# EAGLE board pen15 (EAGLE 5.07)
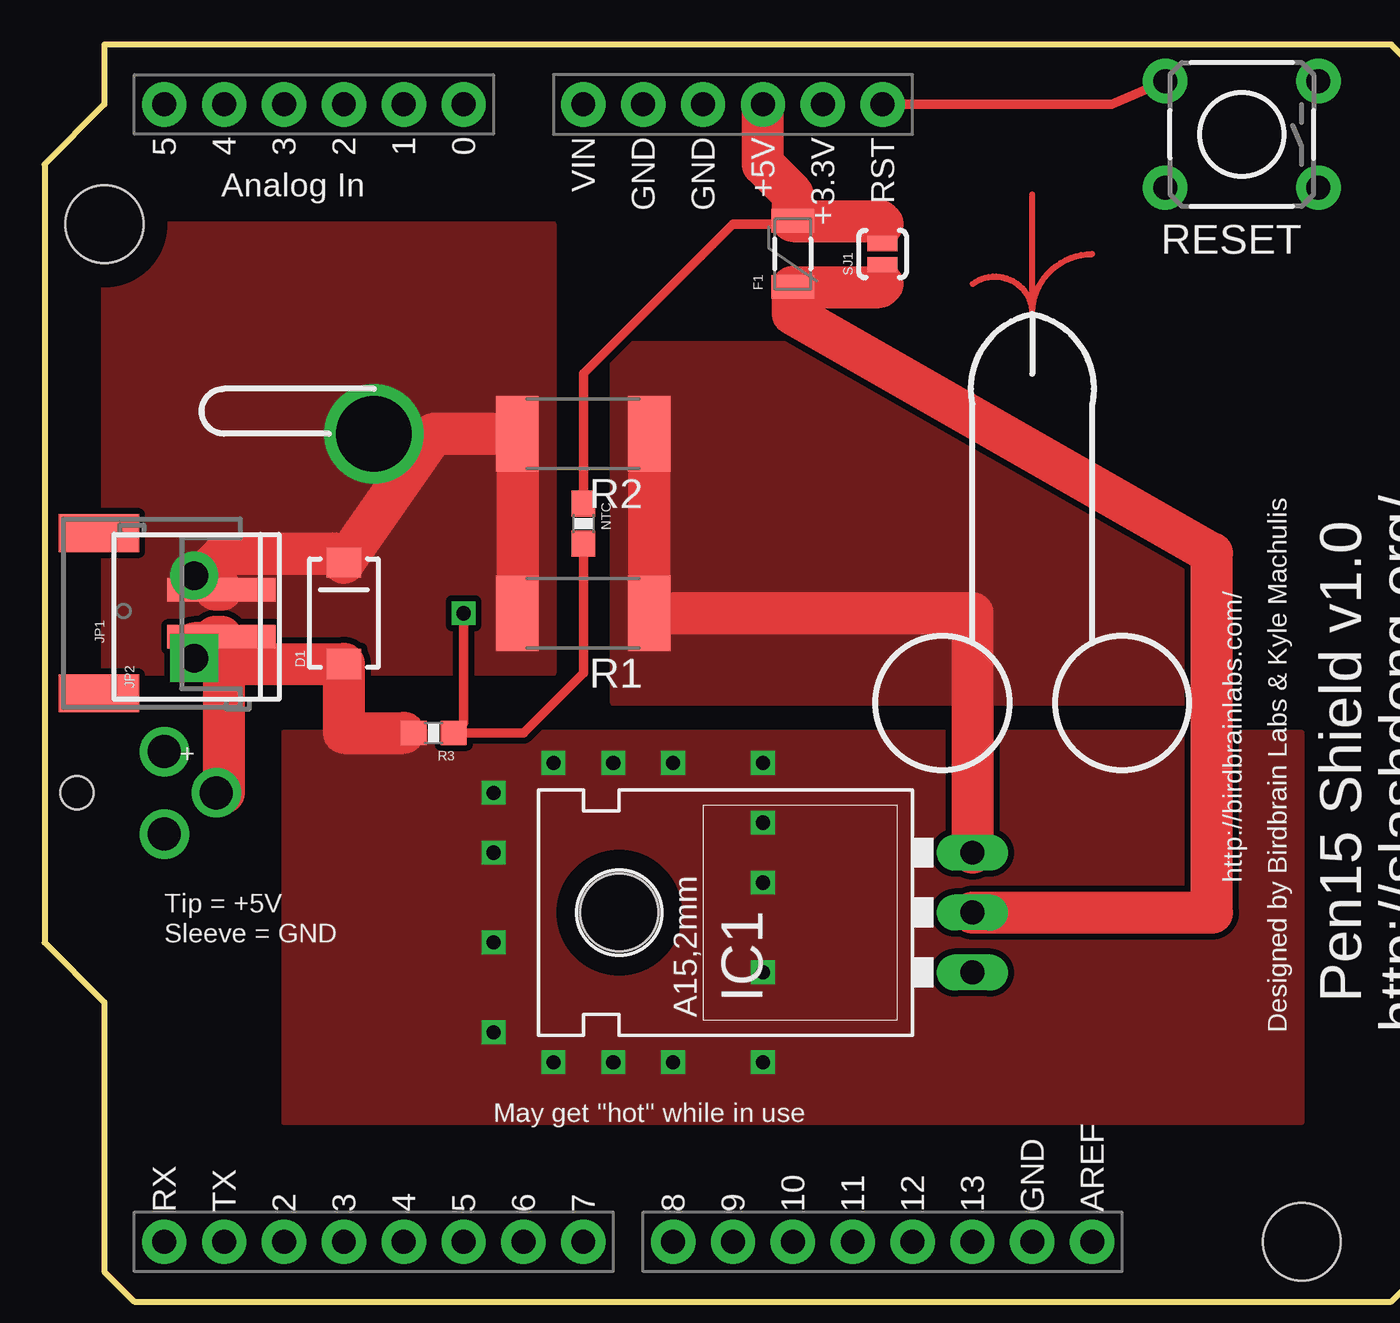
[diagram p0: board, top side]
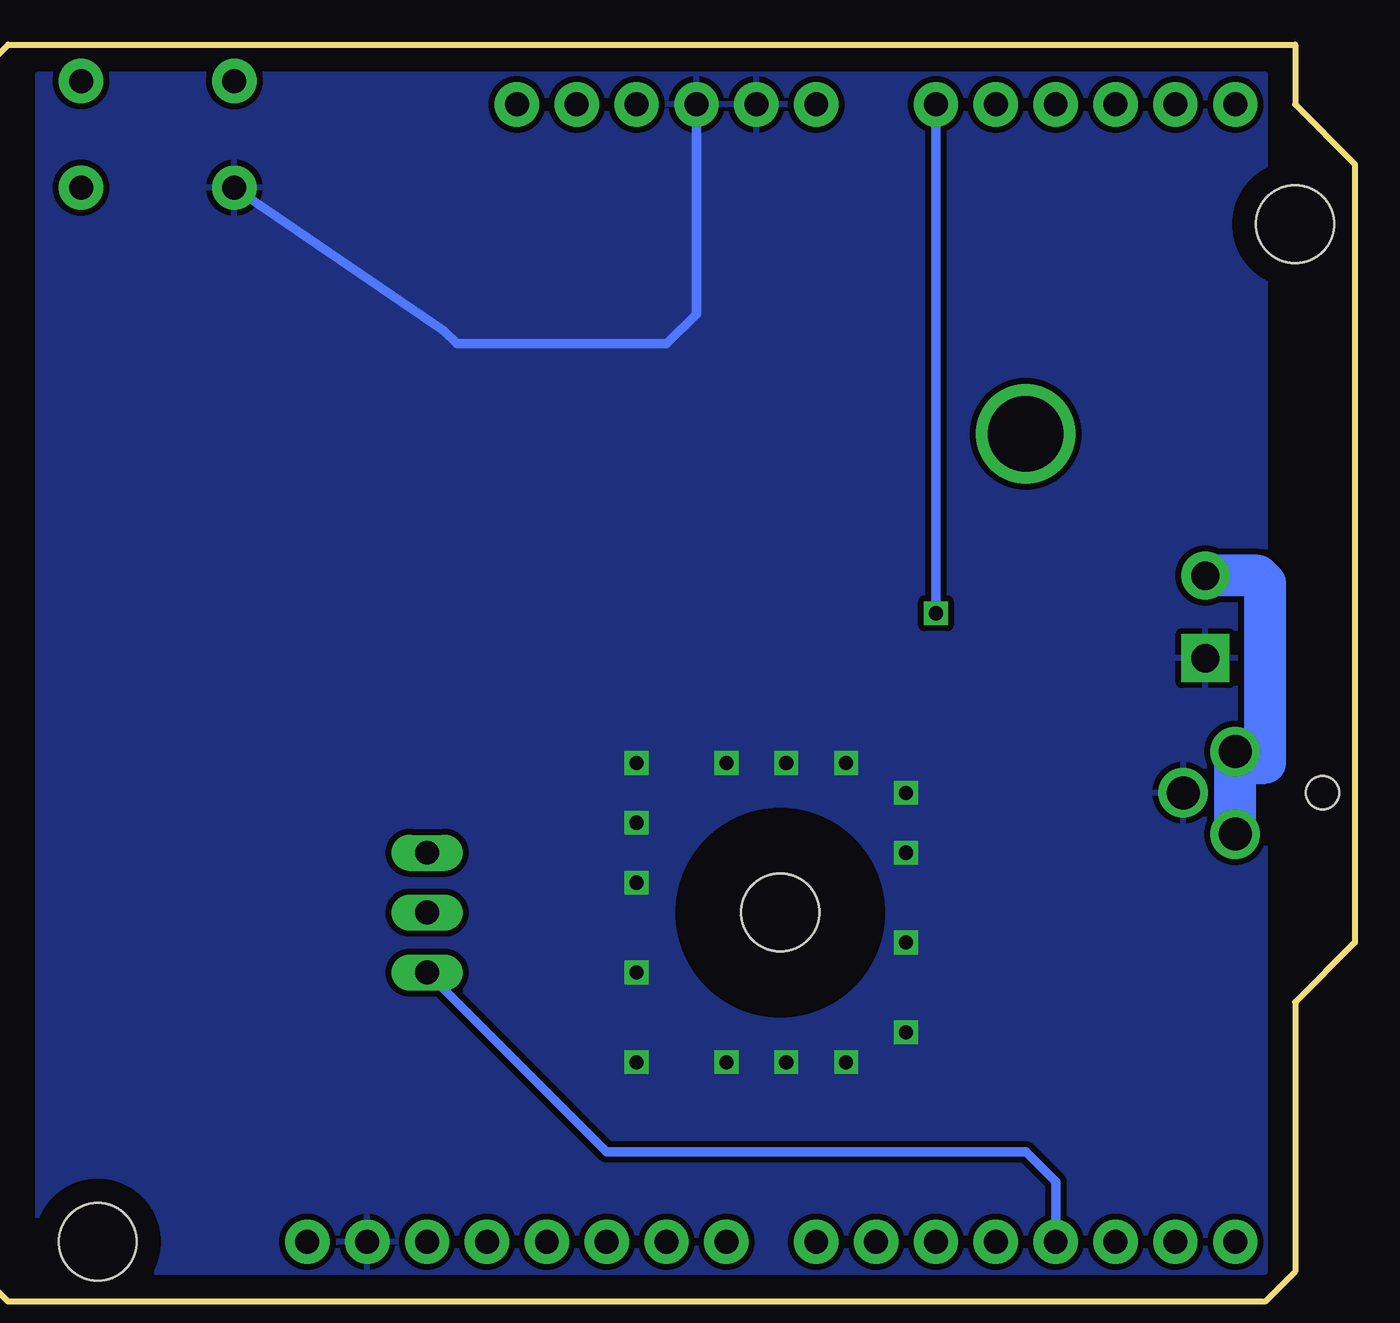
[diagram p1: board, bottom side, seen from below]

No outline drawn. Coordinates in mm, seen from the top.
Copper layers (1*16): Top 0.035mm / dielectric 1.5mm / Bottom 0.035mm
Design rules "default": minimum track width 10mil, minimum drill 24mil, track to track 8mil, track to pad 8mil, pad to pad 8mil, via to via 8mil, smd to smd 8mil, copper to edge 40mil, drill to drill 8mil, minimum pad ring 10mil, minimum via ring 8mil, stop-mask expansion 4mil, vias tented up to drill 0mil, thermal gap 10mil
Milling: 11 lines

## Footprints (pad centres in the part's own frame; a part is rotated, then mirrored left to right if it is on the bottom)
SMA-DIODE = smd 1.27 x 1.47: A -2.15,0; C 2.15,0
PTC-1206 = smd 1 x 1.8: 1 -1.4,0; 2 1.4,0
78XXL = drill 1.016 long: GND 0,-3.81; IN -2.54,-3.81; OUT 2.54,-3.81 | hole 3.302: 0,11.176
S2B-PH = smd 1 x 4.6: 1 -1,-3.7; 2 1,-3.7 | smd 1.6 x 3.4: NC1 -3.4,1.5; NC2 3.4,1.5
SCREWTERMINAL-3.5MM-2 = drill 1.2 pad 2.032 square: 1 0,0 | drill 1.2 pad 2.032 round: 2 3.5,0
0603-RES = smd 1.1 x 1: 1 -0.85,0; 2 0.85,0
R2512 = smd 1.8 x 3.2: 1 -2.8,0; 2 2.8,0
TACTILE-PTH = drill 1.016 pad 1.88 round: 1 -3.251,2.261; 2 3.251,2.261; 3 -3.251,-2.261; 4 3.251,-2.261
SJ_2S-NO = smd 0.635 x 1.27: 1 -0.45,0; 2 0.45,0
DUEMILANOVE_SHIELD = drill 1.016 pad 1.88 round: 3.3V 50.8,26.67; 5V 50.8,29.21; A0 50.8,41.91; A1 50.8,44.45; A2 50.8,46.99; A3 50.8,49.53; A4 50.8,52.07; A5 50.8,54.61; AREF 2.54,15.24; D2 2.54,49.53; D3 2.54,46.99; D4 2.54,44.45; D5 2.54,41.91; D6 2.54,39.37; D7 2.54,36.83; D8 2.54,33.02; D9 2.54,30.48; D10 2.54,27.94; D11 2.54,25.4; D12 2.54,22.86; D13 2.54,20.32; GND@0 50.8,31.75; GND@1 50.8,34.29; GND@2 2.54,17.78; RES 50.8,24.13; RX 2.54,54.61; TX 2.54,52.07; VIN 50.8,36.83 | hole 3.302: 45.72,57.15; 2.54,6.35
2.5MM-KOBIKON = drill 1.397 round: 1 2.21,0; 2 0,1.753; 3 0,-1.753 | hole 1.397: -3.708,0

## Placement (x,y rotation side)
D1  [SMA-DIODE]  12.7,29.21 90 top
F1  PTCSMD  [PTC-1206]  31.75,44.45 90 top
IC1  [78XXL]  35.56,16.51 90 top
JP1  [S2B-PH]  3.81,29.21 90 top
JP2  [SCREWTERMINAL-3.5MM-2]  6.35,27.3 90 top
NTC  [0603-RES]  22.86,33.02 270 top
R1  [R2512]  22.86,29.21 180 top
R2  [R2512]  22.86,36.83 180 top
R3  [0603-RES]  16.51,24.13 180 top
RESET  [TACTILE-PTH]  50.8,49.53 180 top
SJ1  SOLDERJUMPERNO  [SJ_2S-NO]  35.56,44.45 90 top
U1  ARDUINO_SHIELDLABEL  [DUEMILANOVE_SHIELD]  59.69,0 90 top
U$1  2.5MM-KOBIKON  [2.5MM-KOBIKON]  5.08,21.59 0 top

## Library data of the parts
D1 F1 IC1 JP1 JP2 NTC R1-R3 RESET SJ1 U1 = SparkFun
U$1 = BLP3

## Nets
GND: D1.A JP1.1 JP2.1 R3.2 RESET.2 U1.GND@0 U1.GND@1 U1.GND@2 U$1.1
N$1: IC1.IN U1.D3
N$2: D1.C JP1.2 JP2.2 R1.2 R2.2 U$1.2 U$1.3
N$3: F1.1 IC1.GND SJ1.1
N$5: RESET.4 U1.RES
N$7: IC1.OUT R1.1 R2.1
TEMP: NTC.2 R3.1 U1.A0
VCC: F1.2 NTC.1 SJ1.2 U1.5V

## Tracks (layer width: path | path; a pad name or v marks a point on that pad's centre or on a via)
GND  (via drill 0.6)
  Top 1.778: U$1.1 7.62,21.59 7.62,27.06 | 7.51,27.94 6.35,27.94 JP2.1 7.25,28.21 JP1.1 7.51,27.94 | 7.62,27.06 D1.A 12.7,24.13 15.24,24.13 | 7.62,27.06 7.62,27.94 7.51,27.94
  Bottom 0.406: RESET.2 38.66,41.2 38.1,40.64 29.21,40.64 27.94,41.91 U1.GND@0
  other vias: 21.59,22.86 24.13,22.86 26.67,22.86 30.48,22.86 30.48,20.32 30.48,17.78 30.48,13.97 30.48,10.16 26.67,10.16 24.13,10.16 21.59,10.16 19.05,11.43 19.05,15.24 19.05,19.05 19.05,21.59
  pour Top (isolate 0.254, no thermals): 10.16,24.13 10.16,7.62 53.34,7.62 53.34,24.13
  pour Bottom (isolate 0.254): 3.81,52.07 55.88,52.07 55.88,1.27 3.81,1.27
N$1
  Bottom 0.406: U1.D3 12.7,5.08 13.97,6.35 31.75,6.35 IC1.IN
N$2  (via drill 3.2)
  Top 1.778: R1.2 R2.2 16.51,36.83 D1.C 12.31,31.75 7.62,31.75 6.67,30.8 | JP2.2 6.67,30.8 | 6.67,30.8 7.27,30.21 JP1.2
  Bottom 1.778: JP2.2 4.13,30.8 3.81,30.48 3.81,22.86 5.08,22.86 | 5.08,22.86 U$1.2 | U$1.3 5.08,22.86
  other vias: 13.97,36.83
  pour Top (isolate 0.254, no thermals): 2.54,45.72 21.59,45.72 21.59,26.67 2.54,26.67
N$3
  Top 0.254: 35.56,43.18 SJ1.1
  Top 1.778: IC1.GND 49.53,16.51 49.53,31.75 31.75,41.91 F1.1 35.43,43.05 35.56,43.18
N$4
  Top 0.254: 41.91,41.91 41.91,46.99 | 41.91,41.91 arc-90 44.45,44.45 | 39.37,43.18 arc-127 41.91,41.91
N$5
  Top 0.406: U1.RES 45.29,50.8 RESET.4
N$7
  Top 1.778: IC1.OUT 39.37,29.21 R1.1 R2.1
  pour Top (isolate 0.254, no thermals): 24.13,40.64 50.8,40.64 50.8,25.4 24.13,25.4
TEMP  (via drill 0.6)
  Top 0.406: NTC.2 22.86,26.67 20.32,24.13 R3.1 17.78,24.55 v17.78,29.21
  Bottom 0.406: v17.78,29.21 U1.A0
VCC
  Top 0.254: 35.56,45.72 SJ1.2
  Top 0.406: NTC.1 22.86,39.37 29.21,45.72 31.62,45.72 F1.2
  Top 1.778: U1.5V 30.48,48.26 31.75,46.99 F1.2 35.43,45.85 35.56,45.72

## Text on the board
tPlace: + | http://birdbrainlabs.com/ | Tip = +5V | Sleeve = GND | Pen15 Shield v1.0 | Designed by Birdbrain Labs & Kyle Machulis | http://slashdong.org/ | May get "hot" while in use